# Altium PCB Модуль канала измерения.PcbDoc
Units mm, origin at the board's own origin, x right, y up, seen from the top; angles counter-clockwise.
Board outline 99 x 49.5 mm, 2 copper layers (Component Side, Bottom Layer), stack 1.57 mm thick; 96 components, 59 nets, 315 pads, 60 vias.
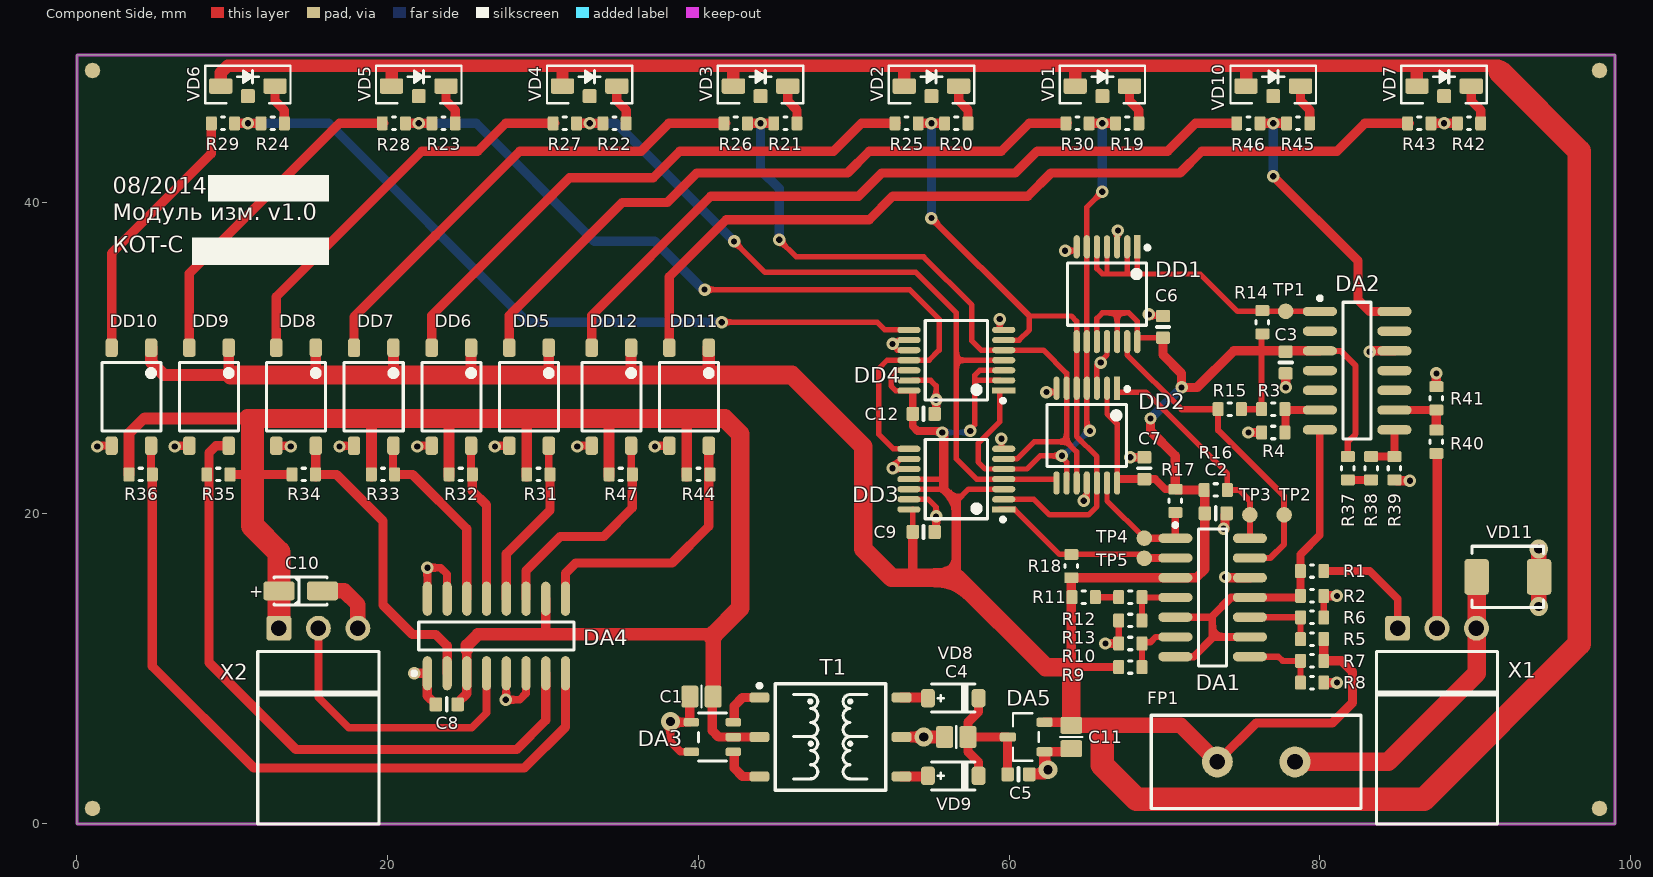
[diagram p0: Component Side view]
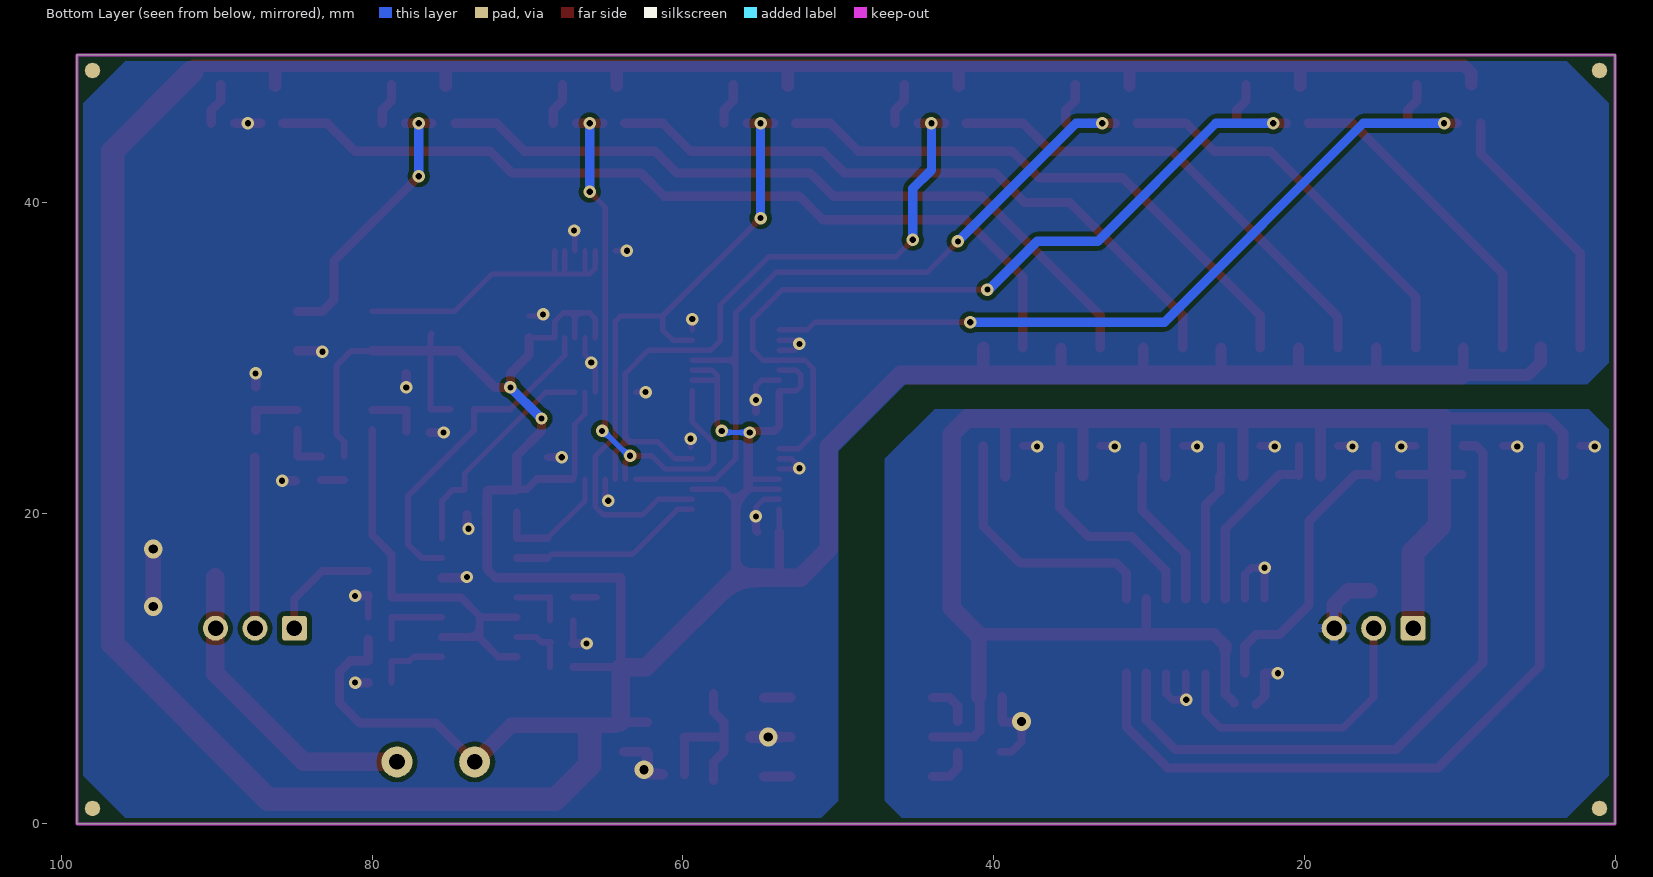
[diagram p1: Bottom Layer view, seen from below]
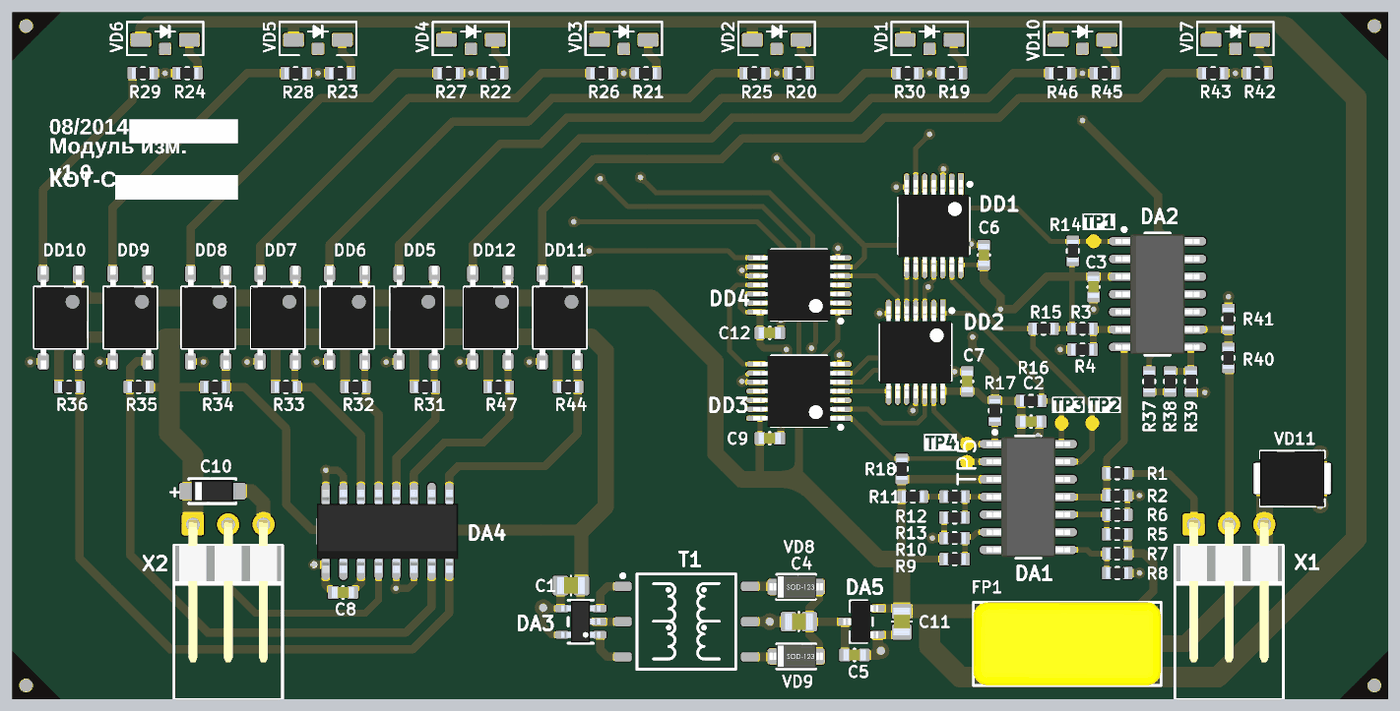
[diagram p2: 3D render of the assembled board from above, using the file's embedded part models]

## Layer stack, top to bottom
Top Solder: solder mask 0.01, Solder Resist, Dk 3.5
Component Side: signal copper 0.035
Dielectric 1: core 1.5, FR-4, Dk 4.2
Bottom Layer: signal copper 0.035
Solder Side: solder mask 0.01, Solder Resist, Dk 3.5

## Board outline
0,0 0,49.5 99,49.5 99,0

## Design rules (kind name [scope] priority, off if disabled: settings)
Clearance Clearance_Polygon [InPolygon] p1: gap=0.3
Clearance [All] p2: gap=0.15
ComponentClearance [All] p1: gap=0 collisioncheckmode=3 verticalgap=0 showdistances=FALSE
HoleSize [All] p1: absolutevalues=TRUE maxlimit=7 minlimit=0.025 maxpercent=80.000 minpercent=20.000
HoleToHoleClearance [All] p1: gap=0.2 allowstackedmicrovias=TRUE
MinimumSolderMaskSliver [All] p1: minsoldermaskwidth=0.05
MinimumSolderMaskSliver SilkscreenOverComponentPads [All] p2: minsoldermaskwidth=0.1
PlaneConnect [All] p1: planeconnectstyle=Direct reliefexpansion=0.508 reliefentries=4 reliefconductorwidth=0.3 reliefairgap=0.254
PolygonConnect PolygonConnect_Vias [All vs isVia] p1: connectstyle=Direct reliefconductorwidth=0.4 reliefentries=4 polygonreliefangle="90 Angle" airgapwidth=0.254
PolygonConnect [All] p2: connectstyle=Relief reliefconductorwidth=0.6 reliefentries=4 polygonreliefangle="90 Angle" airgapwidth=0.254
RoutingVias [All] p1: holewidth=0.4 width=0.8 viastyle="Through Hole" minholewidth=0.3 minwidth=0.3 maxholewidth=2 maxwidth=2
SilkToSilkClearance [All] p1: silktosilkclearance=0
SilkToSolderMaskClearance [IsPad] p1: minsilkscreentomaskgap=0.1 clearancetoexposedcopper=TRUE
SolderMaskExpansion [All] p1: expansion=0.1
Width [All] p1: maxlimit=3 minlimit=0.1 preferedwidth=0.3
23 further rules are at their usual default settings.

## Components (designator, comment, footprint, x,y, rotation, side; value= is the part's Value field where it differs from the comment)
C1 "10мк" CAPC2012L 40.2,8.2 r0 top
C2 "0,1мк" CAPC1608L 73.3,20 r180 top
C3 "0,1мк" CAPC1608L 77.8,29.7 r90 top
C4 "10мк" CAPC2012L 56.6,5.6 r0 top
C5 "0,1мк" CAPC1608L 60.6,3.2 r180 top
C6 "0,1мк" CAPC1608L 69.9,32 r270 top
C7 "0,1мк" CAPC1608L 68.7,22.9 r270 top
C8 "0,1мк" CAPC1608L 23.8,7.7 r0 top
C9 "0,1мк" CAPC1608L 54.5,18.8 r180 top
C10 "10мк" TC3216-1206 14.4,15 r0 top
C11 "10мк" CAPC2012L 64,5.6 r90 top
C12 "0,1мк" CAPC1608L 54.5,26.4 r180 top
DA1 "TLC354CD" SOIC-14 73.1,14.6 r0 top
DA2 "TLC354CD" SOIC-14 82.4,29.2 r0 top
DA3 "SN6501DBV" SOT-023-5 40.9,5.6 r180 top
DA4 "DS2408S" SOIC16 27,12.1 r90 top
DA5 "MCP1700T-3302E/TT" SOT-023-3 61.1,5.6 r90 top
DD1 "SN74HC20PW" TSSOP-14 66.3,34.1 r270 top
DD2 "SN74HC20PW" TSSOP-14 65,25 r270 top
DD3 "74HC30PW,118" TSSOP-14 56.6,22.2 r180 top
DD4 "74HC30PW,118" TSSOP-14 56.6,29.85 r180 top
DD5 "TLP185" MFSOP6 29.1,27.5 r270 top
DD6 "TLP185" MFSOP6 24.1,27.5 r270 top
DD7 "TLP185" MFSOP6 19.1,27.5 r270 top
DD8 "TLP185" MFSOP6 14.1,27.5 r270 top
DD9 "TLP185" MFSOP6 8.5,27.5 r270 top
DD10 "TLP185" MFSOP6 3.5,27.5 r270 top
DD11 "TLP185" MFSOP6 39.4,27.5 r270 top
DD12 "TLP185" MFSOP6 34.4,27.5 r270 top
FP1 "MF-R015/600" MF-R015/600 75.9,4 r180 top
R1 "0603 10 кОм±1 %" RESC1608L 79.5,16.282 r0 top
R2 "40к2" RESC1608L 79.5,14.682 r180 top
R3 "0603 15 кОм±1 %" RESC1608L 77,26.7 r0 top
R4 "40к2" RESC1608L 77,25.2 r0 top
R5 "0603 60,4 кОм±1 %" RESC1608L 79.5,11.9 r180 top
R6 "40к2" RESC1608L 79.5,13.3 r180 top
R7 "0603 110 кОм±1 %" RESC1608L 79.5,10.5 r180 top
R8 "40к2" RESC1608L 79.5,9.1 r180 top
R9 "0603 510 кОм±1 %" RESC1608L 67.8,10.1 r0 top
R10 "40к2" RESC1608L 67.8,11.618 r0 top
R11 "0603 1 МОм±1 %" RESC1608L 64.8,14.6 r180 top
R12 "0603 10 кОм±1 %" RESC1608L 67.8,14.6 r0 top
R13 "40к2" RESC1608L 67.8,13.1 r0 top
R14 "0603 10 кОм±5 %" RESC1608L 76.3,32.3 r270 top
R15 "0603 10 кОм±5 %" RESC1608L 74.2,26.7 r0 top
R16 "0603 10 кОм±5 %" RESC1608L 73.3,21.5 r180 top
R17 "0603 10 кОм±5 %" RESC1608L 70.7,20.8 r90 top
R18 "0603 10 кОм±5 %" RESC1608L 64,16.6 r270 top
R19 "0603 200 Ом±5 %" RESC1608L 67.6,45.1 r0 top
R20 "0603 200 Ом±5 %" RESC1608L 56.6,45.1 r0 top
R21 "0603 200 Ом±5 %" RESC1608L 45.6,45.1 r0 top
R22 "0603 200 Ом±5 %" RESC1608L 34.6,45.1 r0 top
R23 "0603 200 Ом±5 %" RESC1608L 23.6,45.1 r0 top
R24 "0603 200 Ом±5 %" RESC1608L 12.6,45.1 r0 top
R25 "0603 510 Ом±5 %" RESC1608L 53.4,45.1 r180 top
R26 "0603 510 Ом±5 %" RESC1608L 42.4,45.1 r180 top
R27 "0603 510 Ом±5 %" RESC1608L 31.4,45.1 r180 top
R28 "0603 510 Ом±5 %" RESC1608L 20.4,45.1 r180 top
R29 "0603 510 Ом±5 %" RESC1608L 9.4,45.1 r180 top
R30 "0603 510 Ом±5 %" RESC1608L 64.4,45.1 r180 top
R31 "1к" RESC1608L 29.7,22.5 r0 top
R32 "1к" RESC1608L 24.7,22.5 r0 top
R33 "1к" RESC1608L 19.7,22.5 r0 top
R34 "1к" RESC1608L 14.6,22.5 r0 top
R35 "1к" RESC1608L 9.1,22.5 r180 top
R36 "1к" RESC1608L 4.1,22.5 r0 top
R37 "0603 200 Ом±5 %" RESC1608L 81.8,22.9 r270 top
R38 "0603 5,1 кОм±5 %" RESC1608L 83.3,22.9 r90 top
R39 "0603 10 кОм±5 %" RESC1608L 84.8,22.9 r270 top
R40 "0603 5,1 кОм±5 %" RESC1608L 87.5,24.6 r90 top
R41 "0603 10 кОм±5 %" RESC1608L 87.5,27.4 r90 top
R42 "0603 200 Ом±5 %" RESC1608L 89.6,45.1 r180 top
R43 "0603 510 Ом±5 %" RESC1608L 86.4,45.1 r180 top
R44 "1к" RESC1608L 40,22.5 r0 top
R45 "0603 200 Ом±5 %" RESC1608L 78.6,45.1 r180 top
R46 "0603 510 Ом±5 %" RESC1608L 75.4,45.1 r180 top
R47 "1к" RESC1608L 35,22.5 r0 top
T1 "760390014" 7603900 48.5,5.6 r0 top
TP1 "TP 1mm x 1mm" "1MM X 1MM" 77.8,33 r90 top
TP2 "TP 1mm x 1mm" "1MM X 1MM" 77.7,19.9 r90 top
TP3 "TP 1mm x 1mm" "1MM X 1MM" 75.5,19.9 r90 top
TP4 "TP 1mm x 1mm" "1MM X 1MM" 68.7,18.4 r90 top
TP5 "TP 1mm x 1mm" "1MM X 1MM" 68.7,17.1 r90 top
VD1 "HSMY-C110" HSMY-C110 66,47.5 r0 top locked
VD2 "HSMG-C110" HSMG-C110 55,47.5 r0 top locked
VD3 "HSMG-C110" HSMG-C110 44,47.5 r0 top locked
VD4 "HSMG-C110" HSMG-C110 33,47.5 r0 top locked
VD5 "HSMG-C110" HSMG-C110 22,47.5 r0 top locked
VD6 "HSMG-C110" HSMG-C110 11,47.5 r0 top locked
VD7 "HSMG-C110" HSMG-C110 88,47.5 r0 top locked
VD8 "MBR0520L" SOD-123 56.4,8.1 r0 top
VD9 "MBR0520L" SOD-123 56.4,3.1 r0 top
VD10 "HSMS-C110" HSMS-C110 77,47.5 r0 top locked
VD11 "SMBJ5.0CA" DO-214AA 92.1,15.9 r180 top
X1 "PLS-3R1" "PLS-3R-1 FOR PBS" 85,12.6 r0 top locked
X2 "PLS-3R1" "PLS-3R-1 FOR PBS" 13,12.6 r0 top locked

## Footprints (in the part's own frame and the unit in brackets; to place one, negate y for a bottom-side part, rotate by r counter-clockwise, add the part's x,y. Pads: shape width x height; smd on the part's side, far side on the other; paste and mask are expansions set on the pad)
"1MM X 1MM" [mm] "Test Point"
  round 1 smd paste-2 mask+0.05: 1(0,0)
7603900 [mm] "7603900 series Wurst Transformer for SN6501"
  rrect50% 1.27x0.66 smd mask+0.07: 1(-4.572,2.54) 2(-4.572,0) 3(-4.572,-2.54) 4(4.572,-2.54) 5(4.572,0) 6(4.572,2.54)
  silkscreen extent -4.67,-3.43 3.56,3.43, body extent -3.56,-3.43 3.56,3.43, height 4.15
CAPC1608L [mm] "Chip Capacitor, Body 1.6x0.8mm, IPC High Density"
  rrect25% 0.8x0.9 smd mask+0.075: 1(-0.7,0) 2(0.7,0)
  silkscreen extent 0,-0.4 0,0.4, body extent -0.8,-0.4 0.8,0.4, height 0.9
CAPC2012L [mm] "Chip Capacitor, Body 2.0x1.3mm, IPC High Density"
  rrect25% 1.1x1.4 smd mask+0.075: 1(-0.75,0) 2(0.75,0)
  silkscreen extent 0,-0.7 0,0.7, body extent -1,-0.6 1,0.6, height 0.9
DO-214AA [mm] "SMB"
  rrect25% 1.57x2.3 smd: 1(-2.01,0) 2(2.01,0)
  silkscreen extent -2.3,-1.97 2.3,1.98, body extent -2.8,-1.97 2.8,1.98, height 2.67
HSMG-C110 [mm]
  rrect25% 1.5x1 smd paste-0.025: 1(-1.75,0) 2(1.75,0)
  rrect25% 0.9x0.9 smd paste-0.025 mask+0.07: 3(0,-0.65)
  silkscreen extent -2.75,-1.1 2.75,1.3, body extent -1.6,-0.25 1.6,1.25, height 1
HSMS-C110 [mm]
  rrect25% 1.5x1 smd paste-0.025: 1(-1.75,0) 2(1.75,0)
  rrect25% 0.9x0.9 smd paste-0.025 mask+0.07: 3(0,-0.65)
  silkscreen extent -2.75,-1.1 2.75,1.3, body extent -1.6,-0.25 1.6,1.25, height 1
HSMY-C110 [mm]
  rrect25% 1.5x1 smd paste-0.025: 1(-1.75,0) 2(1.75,0)
  rrect25% 0.9x0.9 smd paste-0.025 mask+0.07: 3(0,-0.65)
  silkscreen extent -2.75,-1.1 2.75,1.3, body extent -1.6,-0.25 1.6,1.25, height 1
MF-R015/600 [mm]
  round 2 hole 1 mask+0.07: 1(-2.5,0) 2(2.5,0)
  silkscreen extent -6.75,-3 6.75,3, body extent -6.75,-3 6.75,3, height 12.6
MFSOP6 [mm]
  rrect50% 1.2x0.8 smd mask+0.075: 1(-3.15,1.27) 3(-3.15,-1.27) 4(3.15,-1.27) 6(3.15,1.27)
  silkscreen extent -2.2,-1.9 2.2,1.9, body extent -3.7,-1.9 3.7,1.9, height 2.72
"PLS-3R-1 FOR PBS" [mm]
  rrect25% 1.6x1.6 hole 1: 1(0,0)
  round 1.6 hole 1: 2(2.54,0) 3(5.08,0)
  silkscreen extent -1.36,-12.6 6.44,-1.5, body extent -1.27,-9.92 6.35,0.3, height 2.44
RESC1608L [mm] "Chip Resistor, Body 1.6x0.8mm, IPC High Density"
  rrect25% 0.7x0.9 smd mask+0.075: 1(-0.75,0) 2(0.75,0)
  silkscreen extent -0.1,-0.4 0.1,0.4, body extent -0.8,-0.4 0.8,0.4, height 0.5
SOD-123 [mm] "SM LED; 2 Flat Leads"
  rrect50% 0.9x1.2 smd paste-0.025 mask+0.07: 1(-1.63,0) 2(1.63,0)
  silkscreen extent -1.4,-0.9 1.4,0.9, body extent -1.93,-0.85 1.93,0.85, height 1.42
SOIC16 [mm] "16-Pin Small Outline Integrated Circuit 1.27 mm Pitch, IPC Medium Density"
  oval 2.2x0.6 smd: 1(-2.4,4.445) 2(-2.4,3.175) 3(-2.4,1.905) 4(-2.4,0.635) 5(-2.4,-0.635) 6(-2.4,-1.905) 7(-2.4,-3.175) 8(-2.4,-4.445) 9(2.4,-4.445) 10(2.4,-3.175) 11(2.4,-1.905) 12(2.4,-0.635) 13(2.4,0.635) 14(2.4,1.905) 15(2.4,3.175) 16(2.4,4.445)
  silkscreen extent -2.52,-5 0.9,5.42, body extent -3,-5.08 3,5.08, height 1.7
SOIC-14 [mm] "14-Pin Small Outline Integrated Circuit 1.27 mm Pitch, IPC High Density"
  oval 2.2x0.6 smd: 1(-2.4,3.792) 2(-2.4,2.522) 3(-2.4,1.252) 4(-2.4,-0.018) 5(-2.4,-1.288) 6(-2.4,-2.558) 7(-2.4,-3.828) 8(2.4,-3.828) 9(2.4,-2.558) 10(2.4,-1.288) 11(2.4,-0.018) 12(2.4,1.252) 13(2.4,2.522) 14(2.4,3.792)
  silkscreen extent -2.52,-4.42 0.9,4.77, body extent -3.02,-4.34 3.02,4.3, height 1.62
SOT-023-3 [mm]
  rrect50% 0.6x1.05 smd paste-0.025 mask+0.07: 1(-0.95,-1.18) 2(0.95,-1.18) 3(0,1.18)
  silkscreen extent -1.53,-0.8 1.52,0.85, body extent -1.5,-1.2 1.5,1.3, height 1.12
SOT-023-5 [mm]
  rrect50% 1x0.55 smd mask+0.07: 1(-1.35,0.952) 2(-1.35,0.002) 3(-1.35,-0.953) 4(1.35,-0.95) 5(1.35,0.951)
  silkscreen extent -0.9,-1.55 0.9,1.55, body extent -1.42,-1.5 1.42,1.5, height 1.1
TC3216-1206 [mm] "Capacitor, SM Tantalum; Body 3.2 x 1.6 mm (LxW typ)"
  rrect25% 2x1.2 smd mask+0.075: 1(-1.4,0) 2(1.4,0)
  silkscreen extent -1.7,-0.9 1.7,0.9, body extent -1.6,-0.8 1.6,0.8, height 1.8
TSSOP-14 [mm]
  rect 1.5x0.4 smd paste-0.025 mask+0.075: 1(-3.05,1.95)
  oval 1.5x0.4 smd paste-0.025 mask+0.075: 2(-3.05,1.3) 3(-3.05,0.65) 4(-3.05,0) 5(-3.05,-0.65) 6(-3.05,-1.3) 7(-3.05,-1.95) 8(3.05,-1.95) 9(3.05,-1.3) 10(3.05,-0.65) 11(3.05,0) 12(3.05,0.65) 13(3.05,1.3) 14(3.05,1.95)
  silkscreen extent -3.12,-2.55 2,2.73, body extent -3.3,-2.55 3.3,2.55, height 1.12

## Part data
C1 C4 C11: library part "X7R 0805-10 В-10 мкФ±15 %", "X7R 0805-10 В-10 мкФ±15 %"
C2 C3 C5 C6 C7 C8 C9 C12: library part "X7R 0603-50 В-0,1 мкФ±10 %", "X7R 0603-50 В-0,1 мкФ±10 %"
C10: library part "Танталовый A 10 В-10 мкФ±20 %", "Танталовый A 10 В-10 мкФ±20 %"
DD3 DD4: library part "74HC30PW,118 (5NAND)"
R2 R4 R6 R8 R10 R13: library part "0603 40,2 кОм±1 %", "0603 40,2 кОм±1 %"
R31 R32 R33 R34 R35 R36 R44 R47: library part "0603 1 кОм±5 %", "0603 1 кОм±5 %"

## Free pads (board coordinates)
  round 1 smd paste-0.025 mask+0.5: 0(1,1) 0(1,48.5) 0(98,1) 0(98,48.5)
  round 1 smd far side paste-0.025 mask+0.5: 0(1,1) 0(1,48.5) 0(98,1) 0(98,48.5)

## Via types
v1: diameter 0.8, hole 0.4, Component Side to Bottom Layer, tented both sides, 55 vias
v2: diameter 1.2, hole 0.6, Component Side to Bottom Layer, tented both sides, 5 vias

## Nets (pads, with @x,y where several pads share a name; then routed paths per layer and width w, separated by ;. In a path a pad name is that pad's centre, name@x,y a point inside that pad or via, vN(x,y) a via of type N, cw(c..) or ccw(c..) an arc to the next point about the centre after c; other vN are vias at no path point)
1WIRE: DA4.4 X2.2 | length 19
  Component Side w0.5: X2.2 15.54,8.16 17.5,6.2 25.4,6.2 26.365,7.165 DA4.4
+3.3V: C1.2 C8.2 C10.1 DA3.2 DA4.3 DA4.10 R31.1 R32.1 R33.1 R34.1 R35.1 R36.1 R44.1 R47.1 T1.2 X2.1 | length 122.1
  Component Side w0.6: R35.1 11.3,22.5 R34.1 ; C8.2@24.5,7.8 25.099,8.401 25.099,11.199 ; 30.175,12.2 DA4.10 ; C1.2@40.9,8.1 40.9,6 41.3,5.6 T1.2
  Component Side w0.7: R36.1 3.35,25.15 4.3,26.1 ; R33.1@18.95,22.4 18.95,25.6 ; R32.1@23.95,22.4 23.95,25.6 ; R31.1@28.95,22.4 28.95,25.6 ; R47.1@34.25,22.4 34.25,25.6 ; R44.1@39.25,22.4 39.25,26
  Component Side w0.8: 4.4,26.1 11,26.1 ; 25.1,11.2 25.1,11.5 25.8,12.2 30.175,12.2 41,12.2
  Component Side w1: C1.2 40.95,12.05
  Component Side w1.2: 11,26.1 41.7,26.1 42.7,25.1 42.7,13.9 41,12.2 40.9,12.1
  Component Side w1.5: 11.3,25.6 11.3,19.2 13,17.5 X2.1
+3.3VISO: C2.2 C3.2 C6.2 C7.2 C9.2 C11.2 C12.2 DA1.3 DA2.3 DA5.2 DD1.10 DD1.12 DD1.14 DD2.2 DD2.14 DD3.3 DD3.11 DD3.12 DD3.14 DD4.2 DD4.3 DD4.12 DD4.14 DD5.1 DD6.1 DD7.1 DD8.1 DD9.1 DD10.1 DD11.1 DD12.1 FP1.2 R3.1 R5.1 R7.1 R9.1 R11.2 R14.2 R15.2 R16.2 R17.2 R18.2 R37.1 VD1.1 VD2.1 VD3.1 VD4.1 VD5.1 VD6.1 VD7.1 VD10.1 | length 398.7
  Component Side w0.35: C9.2 DD3.14@53.8,20.25 ; DD3.12@53.8,21.55 55.8,21.55 ; DD3.11@53.8,22.2 55.8,22.2 ; DD4.14@53.8,27.9 52.7,27.9 52.4,28.2 52.4,28.9 52.7,29.2 DD4.12@53.8,29.2 ; 56.6,20.75 57.4,21.55 DD3.3@59.4,21.55 ; v1(57.5,25.3) 57.5,25.4 57.8,25.7 57.8,28.9 58.1,29.2 DD4.3@59.4,29.2 ; 57.9,28.55 DD4.2@59.4,28.55 ; DD1.10@65.65,31.3 65.65,32.55 66,32.9 67.7,32.9 68.25,32.35 68.25,31.3 C6.2 ; DD2.2@66.3,27.8 66.3,26.4 66.95,25.75 DD2.14@66.95,22.45 ; DD1.12@66.95,31.3 66.95,32.9
  Component Side w0.4: R15.2 R3.1 R14.2@76.25,31.5 ; R14.2@76.2,31.5 R14.2@76.2,31.55 ; DA2.3 81.348,30.452 82.3,29.5 82.3,25.1 81.8,24.6 R37.1
  Component Side w0.5: C12.2 53.8,25.6 54.1,25.3 v1@55.8,25.3 ; C12.2@53.8,26.5 DD4.14@53.8,27.8 ; 64,10.1 R9.1 ; DD2.14@67.1,22.2 69.4,22.2 70.05,21.55 R17.2 ; C2.2@72.6,19.9 C2.2@72.7,20
  Component Side w0.6: 53.8,16 C9.2 ; v1@55.8,25.2 55.8,21.55 56.6,20.75 56.6,15.85 ; DA5.2 C11.2@64,6.55 ; 64,10.1 R18.2 ; R18.2@64,15.852 DA1.3 72.052,15.852 72.6,16.4 C2.2@72.6,19.9 ; v1(69.1,26.1) 69.1,25.3 70.7,23.7 R17.2 70.75,21.5 R16.2@72.35,21.5 ; C6.2 69.9,30.2 71.1,29 v1(71.1,28.1) 72.1,28.1 74.452,30.452 DA2.3 ; C2.2 R16.2@72.6,21.45 ; FP1.2 75.9,6.5 80.8,6.5 82.1,7.8 82.1,9.8 81.4,10.5 R7.1 R5.1
  Component Side w0.7: 9.77,29.27 DD9.1 ; 15.37,29.27 DD8.1 ; 20.37,29.27 DD7.1 ; 25.37,29.27 DD6.1 ; 30.37,29.27 DD5.1 ; 35.67,29.27 DD12.1
  Component Side w0.8: DD10.1 4.77,29.73 5.6,28.9 10,28.9 ; VD6.1@9.25,47.6 9.25,48.35 9.7,48.8 91.5,48.8 ; VD5.1 20.25,48.75 ; VD4.1 31.25,48.75 ; 40.67,29.3 DD11.1 ; VD3.1 42.25,48.75 ; VD2.1 53.25,48.75 ; VD1.1 64.25,48.75 ; VD10.1 75.25,48.75 ; VD7.1 86.25,48.75
  Component Side w1: C11.2@64.35,6.35 71.05,6.35 FP1.2
  Component Side w1.2: 9.9,28.9 46,28.9 50.6,24.3 50.6,17.7 52.45,15.85 56.6,15.85 62.35,10.1 64,10.1 C11.2@64,6.55
  Component Side w1.5: 66,6 66,3.8 68.2,1.6 86.7,1.6 96.7,11.6 96.7,43.3 91.6,48.4
  Bottom Layer w0.35: v1(55.7,25.2) 57.4,25.2 v1(57.5,25.3)
  Bottom Layer w0.6: v1(69.1,26.1) v1@71.2,28.2
GAP: DA4.11 DD12.6 R47.2 | length 14.5
  Component Side w0.5: R47.2@35.67,22.4 DD12.6
  Component Side w0.6: DA4.11 28.905,16.305 31.1,18.5 33.9,18.5 35.75,20.35 R47.2 R47.2@35.7,22.45
GND: C1.1 C8.1 C10.2 DA3.4 DA3.5 DA4.1 DA4.5 DA4.6 DA4.15 DA4.16 DD5.4 DD6.4 DD7.4 DD8.4 DD9.4 DD10.4 DD11.4 DD12.4 X2.3 | length 29.4
  Component Side w0.5: v1@1.35,24.35 DD10.4 ; v1@6.35,24.35 DD9.4 ; DD8.4 v1@13.71,24.35 ; v1@16.95,24.35 DD7.4 ; v1@21.95,24.35 DD6.4 ; DA4.16 v1(22.555,16.5) 23.4,16.5 23.825,16.075 DA4.15 ; v1@26.95,24.35 DD5.4 ; DA4.5 27.635,8 28.5,8 28.905,8.405 DA4.6 ; v1@32.25,24.35 DD12.4 ; v1@37.25,24.35 DD11.4 ; v2(38.2,6.6) 38.2,5.3 38.851,4.649 DA3.5 ; C1.1 C1.1@39.5,8.15
  Component Side w0.55: v2@38.251,6.549 DA3.4@39.45,6.549
  Component Side w0.6: v1(21.7,9.7) DA4.1 22.555,8.245 C8.1 ; DA3.4@39.45,6.7 C1.1
  Component Side w1: C10.2 17.2,15 18.08,14.12 X2.3
  other v1: 27.6,8 1.3,24.3 6.3,24.3 13.76,24.3 16.9,24.3 21.9,24.3 26.9,24.3 32.2,24.3 37.2,24.3
GNDISO: C2.1 C3.1 C4.1 C5.1 C6.1 C7.1 C9.1 C11.1 C12.1 DA1.12 DA2.12 DA5.1 DD1.3 DD1.7 DD1.11 DD2.3 DD2.7 DD2.11 DD3.7 DD3.9 DD3.10 DD3.13 DD4.7 DD4.9 DD4.10 DD4.13 R2.1 R4.1 R6.1 R8.1 R10.1 R13.1 R39.2 R41.2 R42.2 R43.1 T1.5 VD11.1 | length 47.6
  Component Side w0.35: v1(52.5,22.9) 52.5,23 53,23.5 DD3.9@53.8,23.5 ; v1@52.65,22.85 DD3.10@53.8,22.85 ; DD3.13@53.8,20.9 54.8,20.9 55.3,20.4 v1(55.3,19.8) ; DD4.13@53.8,28.55 54.95,28.55 55.3,28.2 v1(55.3,27.3) ; DD4.10@53.8,30.5 52.8,30.5 52.5,30.8 52.85,31.15 DD4.9@53.8,31.15 ; DD4.7@59.4,31.8 v1(59.4,32.5) ; DD3.7@59.5,24.25 v1(59.5,24.8) ; v1@62.3,27.8 DD2.7@63.05,27.8 ; v1(63.6,36.9) DD1.7@64.35,36.9 ; v1@65,21 DD2.11@65,22.2 ; DD2.3@65.65,27.8 65.65,29.55 66.3,30.2 DD1.11@66.3,31.3 ; DD1.3@66.95,36.9 v1@66.95,38.15 ; v1@69.1,32.7 C6.1
  Component Side w0.4: R10.1 R13.1 ; R6.1 R2.1
  Component Side w0.5: C9.1 55.3,18.9 v1(55.3,19.8) ; C12.1@55.3,26.5 v1(55.3,27.3) ; v1(67.8,23.6) C7.1
  Component Side w0.6: DA5.1 C11.1@63.8,4.65 ; v1(66.2,11.618) R10.1 ; v1@73.9,19 C2.1@73.9,19.9 ; v1@73.948,15.852 DA1.12 ; v1(75.4,25.2) R4.1 ; v1(77.8,28.1) C3.1 ; R8.1 v1(81.1,9.1) ; R2.1 v1(81.1,14.682) ; v1@83.252,30.452 DA2.12 ; R39.2@84.95,22.1 v1(85.8,22.1) ; R43.1 v1(88,45.1) R42.2 ; R41.2 v1(87.5,29)
  Component Side w0.65: T1.5 v2@54.7,5.6
  Component Side w0.7: C5.1 62.28,3.2 DA5.1@62.28,4.5
  Component Side w0.8: v2@54.7,5.6 C4.1@55.6,5.6
  Component Side w1: v2(94.1,14) v2(94.1,17.7)
  other v1: 73.9,15.9 73.8,19 64.8,20.8 62.4,27.8 65.9,29.7 83.2,30.4 52.5,30.9 69,32.8 67,38.2
  other v2: 62.5,3.5 54.5,5.6
N1: DA4.8 DD10.6 R36.2 | length 48
  Component Side w0.5: R36.2@4.77,22.53 DD10.6
  Component Side w0.6: R36.2 4.85,10.15 11.4,3.6 28.797,3.6 31.445,6.248 DA4.8
N2: DA4.7 DD9.6 R35.2 | length 42.8
  Component Side w0.6: DD9.6 8.95,24.35 8.5,23.9 8.5,10.4 14.1,4.8 28.3,4.8 30.175,6.675 DA4.7
N3: DA4.2 DD8.6 R34.2 | length 20
  Component Side w0.6: R34.2 16.7,22.5 19.7,19.5 19.7,14.1 21.6,12.2 23.1,12.2 23.825,11.475 DA4.2 ; R34.2@15.37,22.33 DD8.6
N4: DA4.14 DD7.6 R33.2 | length 12.5
  Component Side w0.5: R33.2@20.335,22.4 DD7.6@20.335,24.35
  Component Side w0.6: R33.2 21.6,22.5 25.095,19.005 DA4.14
N5: DA4.13 DD6.6 R32.2 | length 10.2
  Component Side w0.5: R32.2@25.37,22.4 DD6.6
  Component Side w0.6: R32.2@25.45,22.4 25.45,21.45 26.365,20.535 DA4.13
NetC4_2: C4.2 C5.2 DA5.3 VD8.2 VD9.2 | length 11.1
  Component Side w0.6: VD9.2@58.03,2.8 58.03,3.97 57.35,4.65 C4.2 ; VD8.2@58.03,8.4 58.03,7.23 57.35,6.55 C4.2 ; C5.2 DA5.3@59.9,5.58 ; DA5.3 C4.2
NetDA1_1: DA1.1 DD2.13 R17.1 TP4.1 | length 8.5
  Component Side w0.35: DD2.13@66.3,22.2 66.3,20.8 TP4.1 TP4.1@68.708,18.392
  Component Side w0.5: TP4.1@68.708,18.392 DA1.1 R17.1
NetDA1_2: DA1.2 DD3.1 R18.1 TP5.1 | length 12.6
  Component Side w0.35: DD3.1@59.4,20.25 60.35,20.25 63.25,17.35 R18.1 68.472,17.35 TP5.1@68.7,17.122
  Component Side w0.5: TP5.1@68.722,17.122 DA1.2
NetDA1_4: DA1.4 R12.2 R13.2 | length 3.6
  Component Side w0.4: R13.2 R12.2@68.55,14.582 ; R12.2 R12.2@68.55,14.582 ; DA1.4 R12.2@68.55,14.582
NetDA1_5: DA1.5 DA1.7 DA1.9 DA1.11 DA2.7 R1.1 R2.2 | length 26.4
  Component Side w0.5: DA1.7 71.872,10.772 73.072,11.972 73.072,12.042 ; DA1.5 73.012,13.312 ; DA1.9 73.072,12.042 ; R2.2@78.75,14.582 DA1.11 74.282,14.582 73.072,13.372 73.072,12.042 ; R2.2 R1.1 78.75,17.35 80,18.6 DA2.7
NetDA1_6: DA1.6 R9.2 R10.2 | length 3.9
  Component Side w0.4: R10.2@68.5,11.7 69.1,11.7 69.442,12.042 DA1.6 ; R9.2 R10.2
NetDA1_8: DA1.8 R7.2 R8.2 | length 4.8
  Component Side w0.4: DA1.8 77.328,10.772 77.6,10.5 R7.2 R8.2
NetDA1_10: DA1.10 R5.2 R6.2 | length 4.7
  Component Side w0.4: DA1.10 R6.2@78.75,13.312 ; R5.2 R6.2
NetDA1_13: DA1.13 DD1.13 R15.1 TP2.1 | length 21.4
  Component Side w0.35: DD1.13@67.6,31.3 67.6,30.2 71.1,26.7
  Component Side w0.4: 71.1,26.7 R15.1 73.45,25.35 77.7,21.1 TP2.1 77.7,18 76.822,17.122 DA1.13
NetDA1_14: DA1.14 DD2.1 R16.1 TP3.1 | length 14.5
  Component Side w0.35: DD2.1@66.95,27.8 68.8,27.8 74.05,22.55 R16.1
  Component Side w0.4: R16.1 74.8,21.5 75.5,20.8 TP3.1 DA1.14
NetDA2_1: DA2.1 DD1.1 DD1.2 DD1.4 DD1.5 R14.1 TP1.1 | length 21
  Component Side w0.35: DD1.5@65.65,36.9 65.65,35.75 66,35.4 72.3,35.4 74.708,32.992 DA2.1 ; 66.3,35.45 DD1.4@66.3,36.9 ; 67.6,35.45 DD1.2@67.6,36.9 ; 68.25,35.45 DD1.1@68.25,36.9
NetDA2_6: DA2.6 R3.2 R4.2 | length 3.6
  Component Side w0.5: R4.2@77.792,25.242 77.792,26.642 DA2.6
NetDA2_8: DA2.8 R38.2 R39.1 | length 3.2
  Component Side w0.5: R38.2 R39.1 DA2.8
NetDA2_9: DA2.9 R40.2 R41.1 | length 4
  Component Side w0.5: DA2.9 R41.1@87.5,26.642
  Component Side w0.6: R40.2 R41.1
NetDA2_14: DA2.14 R45.2 R46.1 | length 18
  Component Side w0.6: R46.1 v1(77,45.1) R45.2 ; v1(77,41.7) 82.45,36.25 82.45,33.75 83.208,32.992 DA2.14
  Bottom Layer w0.6: v1(77,41.7) v1(77,45.1)
NetDA3_1: DA3.1 T1.3 | length 2.8
  Component Side w0.6: DA3.1@42.3,4.597 42.3,3.6 42.84,3.06 T1.3
NetDA3_3: DA3.3 T1.1 | length 2.8
  Component Side w0.6: DA3.3@42.3,6.602 42.3,7.6 42.84,8.14 T1.1
NetDD1_6: DD1.6 DD1.9 DD2.4 DD2.9 DD3.5 DD4.1 R19.1 R30.1 | length 36.9
  Component Side w0.35: DD4.1@59.4,27.9 59.4,25.9 58,24.5 58,23.3 58.45,22.85 61.15,22.85 62,23.7 63.3,23.7 63.7,23.3 DD2.9@63.7,22.2 ; v1@65,25.5 65,27.8 65,36.9 65,39.7 v1(66,40.7)
  Component Side w0.6: R30.1 v1(66,45.1) R19.1
  Bottom Layer w0.35: v1(63.4,23.7) 63.5,23.7 65.1,25.3 v1(65.2,25.3)
  Bottom Layer w0.6: v1(66,40.7) v1(66,45.1)
NetDD1_8: DD1.8 DD2.5 DD2.12 DD3.2 DD4.6 R20.1 R25.1 | length 42.3
  Component Side w0.35: DD3.2@59.4,20.9 61.6,20.9 62.6,19.9 65.1,19.9 65.65,20.45 65.65,23.65 64.35,24.95 64.35,27.8 64.35,32.35 64,32.7 61.3,32.7 61.3,31.8 60.65,31.15 DD4.6@59.4,31.15
  Component Side w0.4: v1(55,39) 61.3,32.7
  Component Side w0.6: R25.1 v1(55,45.1) R20.1
  Bottom Layer w0.6: v1(55,39) v1(55,45.1)
NetDD2_6: DD2.6 DD2.10 DD3.6 DD4.5 R21.1 R26.1 | length 44.9
  Component Side w0.35: v1(45.2,37.6) 46.3,36.5 54.5,36.5 57.6,33.4 57.6,31.1 58.2,30.5 59.4,30.5 62.2,30.5 63.7,29 63.7,27.8 63.7,24.6 ; DD3.6@59.4,23.5 60.5,23.5 61.6,24.6 63.7,24.6 ; DD2.10@64.35,22.2 64.35,23.95 63.7,24.6
  Component Side w0.6: R26.1 v1(44,45.1) R21.1
  Bottom Layer w0.6: v1(44,45.1) 44,42.1 45.2,40.9 v1(45.2,37.6)
NetDD2_8: DD2.8 DD3.4 DD4.4 R22.1 R27.1 | length 49.5
  Component Side w0.35: v1(42.3,37.5) 44.3,35.5 54,35.5 56.6,32.9 56.6,30.4 56.6,23.5 57.9,22.2 59.4,22.2 DD2.8@63.05,22.2 ; 56.6,29.85 DD4.4@59.4,29.85
  Component Side w0.6: R27.1 v1(33,45.1) R22.1
  Bottom Layer w0.6: v1(33,45.1) 34.7,45.1 v1(42.3,37.5)
NetDD3_8: DD3.8 DD4.11 R23.1 R28.1 | length 53.6
  Component Side w0.35: v1(40.4,34.4) 53.6,34.4 55.5,32.5 55.5,30.5 54.85,29.85 53.8,29.85 52.15,29.85 51.6,29.3 51.6,25.1 52.55,24.15 DD3.8@53.8,24.15
  Component Side w0.6: R28.1 v1(22,45.1) R23.1
  Bottom Layer w0.6: v1(22,45.1) 25.7,45.1 33.3,37.5 37.2,37.5 40.3,34.4 v1(40.4,34.4)
NetDD4_8: DD4.8 R24.1 R29.1 | length 50
  Component Side w0.35: v1(41.5,32.3) 51.5,32.3 52,31.8 DD4.8@53.8,31.8
  Component Side w0.6: R29.1 v1(11,45.1) R24.1
  Bottom Layer w0.6: v1(11,45.1) 16.2,45.1 29,32.3 v1(41.5,32.3)
NetDD5_3: DD5.3 R30.2 | length 43.1
  Component Side w0.6: DD5.3 27.83,32.73 35.1,40 38,40 39.9,41.9 49.6,41.9 51,43.3 59.5,43.3 61.3,45.1 R30.2@63.75,45.1
NetDD6_3: DD6.3 R25.2 | length 37.1
  Component Side w0.6: DD6.3 22.83,32.73 31.7,41.6 37.1,41.6 38.8,43.3 48.7,43.3 50.5,45.1 R25.2@52.75,45.1
NetDD7_3: DD7.3 R26.2 | length 31.1
  Component Side w0.6: DD7.3 17.83,32.63 28.5,43.3 36.3,43.3 38.1,45.1 R26.2@41.75,45.1
NetDD8_3: DD8.3 R27.2 | length 25.8
  Component Side w0.6: DD8.3 12.83,33.93 22.2,43.3 25.8,43.3 27.6,45.1 R27.2@30.75,45.1
NetDD9_3: DD9.3 R28.2 | length 21.3
  Component Side w0.6: DD9.3 7.23,35.43 16.9,45.1 R28.2@19.75,45.1
NetDD10_3: DD10.3 R29.2 | length 17.1
  Component Side w0.6: DD10.3 2.23,36.73 8.65,43.15 R29.2
NetDD11_3: DD11.3 R43.2 | length 56.3
  Component Side w0.6: DD11.3 38.13,35.23 41.8,38.9 51,38.9 52.5,40.4 61.2,40.4 62.7,41.9 71,41.9 72.4,43.3 81.1,43.3 82.9,45.1 R43.2@85.75,45.1
NetDD12_3: DD12.3 R46.2 | length 48.7
  Component Side w0.6: DD12.3 33.13,32.73 40.8,40.4 50.3,40.4 51.8,41.9 60.4,41.9 61.8,43.3 70.2,43.3 72,45.1 R46.2
NetR11_1: R11.1 R12.1 | length 1.5
  Component Side w0.4: R11.1 R12.1
NetR19_2: R19.2 VD1.2 | length 2.7
  Component Side w0.6: VD1.2@67.75,47.6 67.75,46.55 68.35,45.95 R19.2
NetR20_2: R20.2 VD2.2 | length 2.7
  Component Side w0.6: VD2.2@56.75,47.6 56.75,46.55 57.35,45.95 R20.2
NetR21_2: R21.2 VD3.2 | length 2.7
  Component Side w0.6: VD3.2@45.75,47.6 45.75,46.55 46.35,45.95 R21.2
NetR22_2: R22.2 VD4.2 | length 2.7
  Component Side w0.6: VD4.2@34.75,47.6 34.75,46.55 35.35,45.95 R22.2
NetR23_2: R23.2 VD5.2 | length 2.7
  Component Side w0.6: VD5.2@23.75,47.6 23.75,46.55 24.35,45.95 R23.2
NetR24_2: R24.2 VD6.2 | length 2.7
  Component Side w0.6: VD6.2@12.75,47.6 12.75,46.55 13.35,45.95 R24.2
NetR37_2: R37.2 R38.1 | length 1.5
  Component Side w0.5: R37.2 R38.1
NetR42_1: R42.1 VD7.2 | length 2.7
  Component Side w0.6: VD7.2@89.75,47.6 89.75,46.55 90.35,45.95 R42.1
NetR45_1: R45.1 VD10.2 | length 2.7
  Component Side w0.6: VD10.2@78.75,47.6 78.75,46.55 79.35,45.95 R45.1
NetT1_4: T1.4 VD9.1 | length 1.7
  Component Side w0.65: T1.4 VD9.1@54.77,3.06
NetT1_6: T1.6 VD8.1 | length 1.7
  Component Side w0.65: T1.6 VD8.1@54.77,8.14
PIPE: R1.2 X1.1 | length 7.4
  Component Side w0.5: R1.2 83.218,16.282 85.02,14.48 X1.1@85.02,12.6
SIGNAL: FP1.1 VD11.2 X1.3 | length 20.3
  Component Side w1.2: FP1.1 84.4,4 90.1,9.7 VD11.2@90.1,15.89
TRANSIT: R40.1 X1.2 | length 11
  Component Side w0.6: X1.2@87.56,12.6 R40.1@87.56,23.6
WET: DA4.12 DD5.6 R31.2 | length 11.2
  Component Side w0.5: R31.2@30.37,22.17 DD5.6
  Component Side w0.6: DA4.12 27.635,17.385 30.45,20.2 R31.2@30.45,22.4
WORK: DA4.9 DD11.6 R44.2 | length 17.3
  Component Side w0.6: DA4.9 31.445,16.145 32.1,16.8 38.3,16.8 40.67,19.17 DD11.6
pads on no net: DA2.2 DA2.4 DA2.5 DA2.10 DA2.11 DA2.13 VD1.3 VD2.3 VD3.3 VD4.3 VD5.3 VD6.3 VD7.3 VD10.3

## Polygon pours and split planes (outlines as drawn)
GND on Bottom Layer "Bottom Layer-No Net" (solid, pour order 2): 1.7,26.7 43.8,26.7 47,23.5 47,1.5 45.5,0 3.5,0 0,3.5 0,25
GNDISO on Bottom Layer "Bottom Layer-No Net 1" (solid, pour order 5): 50,1.5 51.5,0 54.3,0 95.5,0 99,3.5 99,36.5 99,46 95.5,49.5 3.5,49.5 0,46 0,30.1 1.8,28.3 45.7,28.3 50,24

## Keep-outs
Keep-Out Layer:
  the board outline again, w0.2

## Silkscreen, mask and mechanical layers (free items; w line width, h text height)
Top Overlay:
  rectangle: 7.415,35.978 16.23,37.76
  rectangle: 8.422,40.06 16.23,41.773
  text "08/2014" at 2.3,40.2 h1.8
  text "Модуль изм. v1.0" at 2.3,38.5 h1.8
  text "КОТ-С" at 2.3,36.4 h1.8
  text "+" at 11.1,14.6 h0.8
Top Solder:
  region: 0,49.5 0,46 3.5,49.5
  region: 0,0 3.5,0 0,3.5
  region: 99,0 99,3.5 95.5,0
  region: 99,49.5 99,46 95.5,49.5
Solder Side:
  region: 0,49.5 0,46 3.5,49.5
  region: 0,0 3.5,0 0,3.5
  region: 99,0 99,3.5 95.5,0
  region: 99,49.5 99,46 95.5,49.5
Mechanical 1:
  lines w0.2: 253.1,92.251 255.8,92.251 ; 253.1,389.251 255.8,389.251 ; 254.447,90.701 254.447,93.801 ; 254.447,387.7 254.447,390.8 ; 667.103,92.251 669.803,92.251 ; 667.103,389.251 669.803,389.251 ; 668.45,90.7 668.45,93.8 ; 668.45,387.701 668.45,390.801
Mechanical 4:
  lines w0.3: 478.45,102.251 543.45,102.251 ; 478.45,107.251 543.45,107.251 ; 478.45,112.251 543.45,112.251 ; 478.45,117.251 543.45,117.251 ; 478.45,122.251 543.45,122.251 ; 478.45,137.251 543.45,137.251 ; 478.45,142.251 543.45,142.251 ; 478.45,147.251 543.45,147.251 ; 618.45,117.251 618.45,132.251 ; 623.45,117.251 623.45,132.251
  lines w0.75: 259.447,122.251 271.447,122.251 ; 259.447,157.251 271.447,157.251 ; 259.447,182.251 271.447,182.251 ; 259.447,207.251 271.447,207.251 ; 259.447,324.251 271.447,324.251 ; 264.447,97.251 264.447,242.251 ; 264.447,264.251 264.447,384.251 ; 271.447,242.251 259.447,242.251 259.447,97.251 271.447,97.251 ; 271.447,264.251 259.447,264.251 259.447,384.251 271.447,384.251 ; 271.447,370.251 341.447,370.251 341.447,384.251 ; 478.45,127.251 543.45,127.251 ; 478.45,132.251 543.45,132.251 ; 478.5,97.251 271.447,97.251 ; 485.45,127.251 485.45,152.251 ; 495.45,97.251 495.45,152.251 ; 518.45,97.251 518.45,152.251 ; 533.45,97.251 533.45,152.251 ; 543.45,97.251 543.45,152.251 ; 543.45,112.251 663.45,112.251 ; 543.45,137.251 663.45,137.251 ; 613.45,97.251 613.45,137.251 ; 613.45,117.251 663.45,117.251 ; 613.45,132.251 663.45,132.251 ; 628.45,117.251 628.45,137.251 ; 633.45,112.251 633.45,117.251 ; 645.45,117.251 645.45,137.251 ; 663.45,152.251 478.45,152.251 478.45,97.251 663.45,97.251 663.45,384.15 663.349,384.251 271.447,384.251 ; 271.447,97.251 271.447,384.251
  text "Перв. примен." at 262.947,344.251 h3.5 r90
  text "Справ. №" at 262.947,289.251 h3.5 r90
  text "Подп. и дата" at 262.947,215.251 h3.5 r90
  text "Инв. № дубл." at 262.947,186.251 h3.5 r90
  text "Взам. инв. №" at 262.947,160.751 h3.5 r90
  text "Лит." at 618.45,133.751 h3.5
  text "Масса" at 633.45,133.751 h3.5
  text "Масштаб" at 648.45,133.751 h3.5
  text "Подп. и дата" at 262.947,129.751 h3.5 r90
  text "Изм." at 479.45,128.751 h3.5
  text "Лист" at 486.95,128.751 h3.5
  text "№ докум." at 500.95,128.751 h3.5
  text "Подп." at 522.45,128.751 h3.5
  text "Дата" at 534.95,128.751 h3.5
  text "Разраб." at 479.95,123.751 h3.5
  text "*" at 615.45,123.251 h3.5
  text "*" at 636.45,123.251 h3.5
  text "1:1" at 653.45,123.251 h3.5
  text "Пров." at 479.95,118.751 h3.5
  text "Т.контр." at 479.95,113.751 h3.5
  text "Лист" at 616.45,113.751 h3.5
  text "1" at 627.45,113.751 h3.5
  text "Листов" at 636.45,113.751 h3.5
  text "1" at 653.95,113.751 h3.5
  text "Н.контр." at 479.95,103.751 h3.5
  text "НИЧ БГУИР" at 627.45,103.251 h5
  text "Инв. № подл." at 262.947,101.751 h3.5 r90
  text "Утв." at 479.95,98.751 h3.5
  text "2.106-A3" at 276.447,93.751 h3.5
  text "Копировал" at 558.45,93.751 h3.5
  text "Формат А3" at 618.45,93.129 h3.5
Mechanical 13:
  lines w0.2: 0,0 13,0 ; 13,12.6 13,3.1 85,3.1 85,12.6 ; 85,0 99,0

## Dimensions
0,49.5 to 99,49.5 on Mechanical 5
0,0 to 0,49.5 on Mechanical 5

## Panel: embedded boards
"Модуль канала измерения.PcbDoc" at 299.6,215.5, 1 rows x 1 columns, spacing 0 x 0, rotation 0